# Altium PCB PCB1.PcbDoc
Units mm, origin at the board's own origin, x right, y up, seen from the top; angles counter-clockwise.
Board outline 78 x 71 mm, 2 copper layers (Top Layer, Bottom Layer); 37 components, 33 nets, 193 pads, 35 vias.
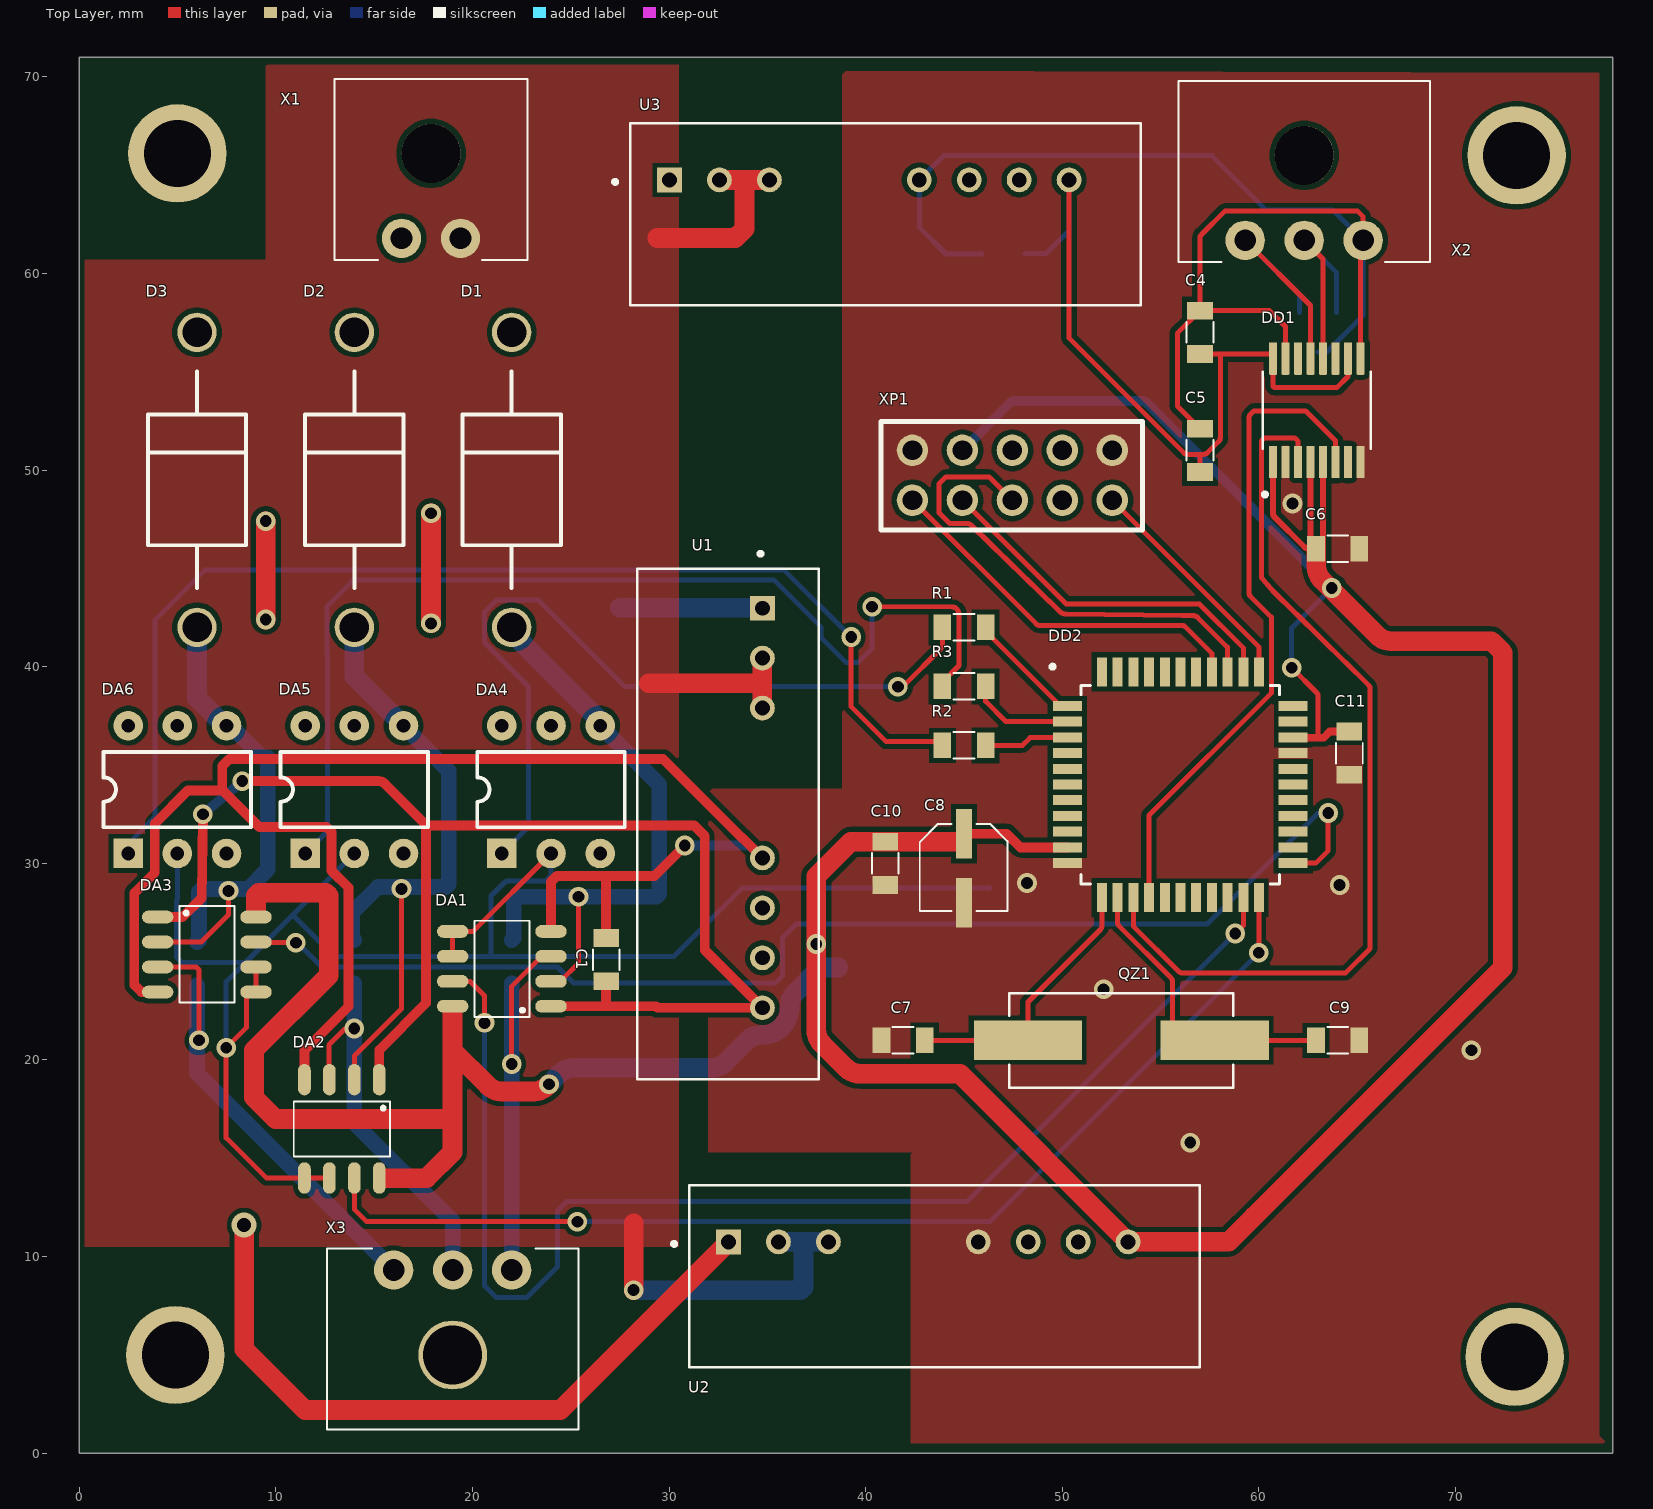
[diagram p0: Top Layer view]
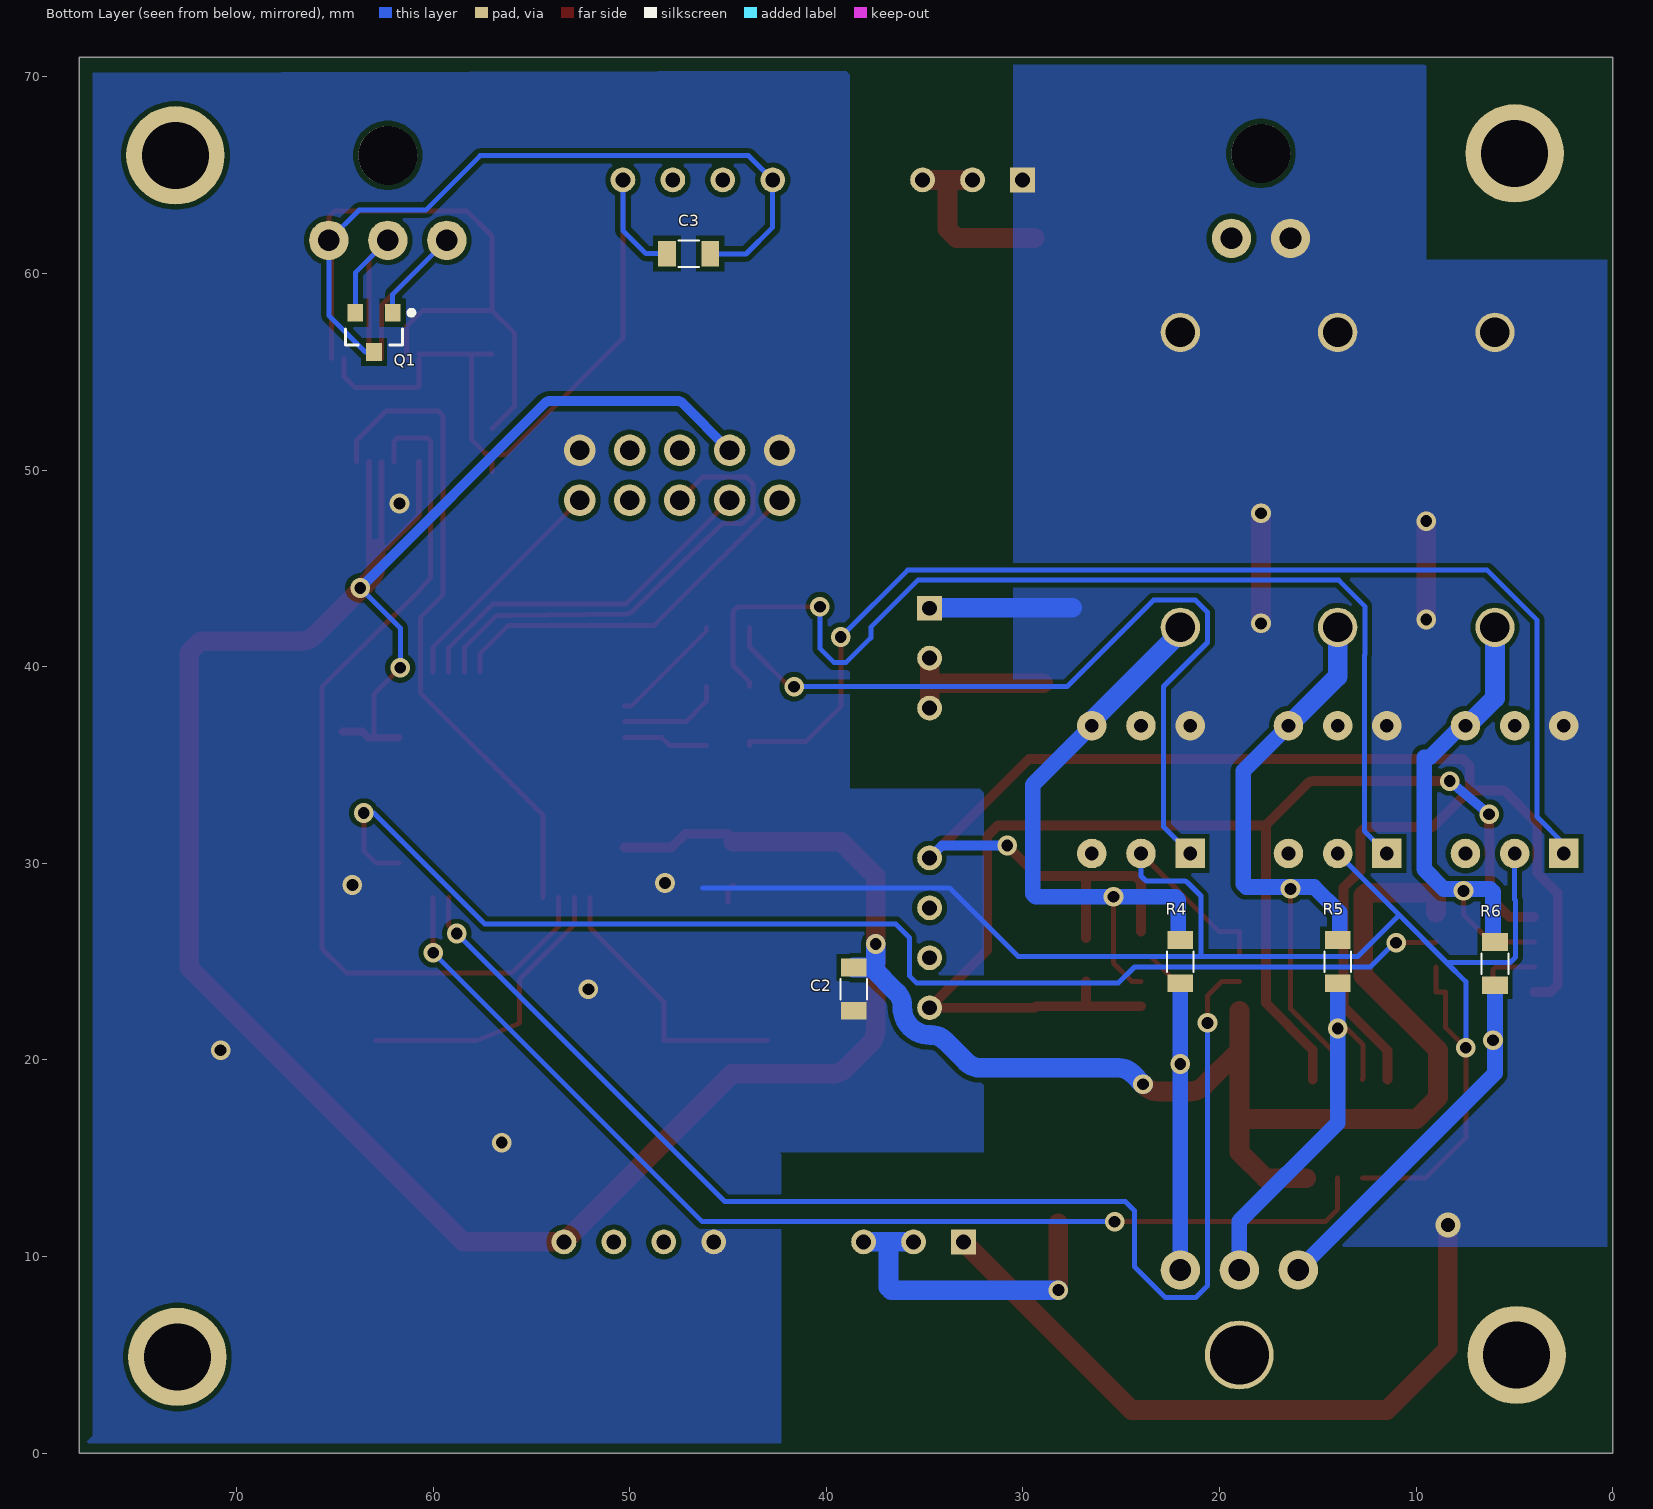
[diagram p1: Bottom Layer view, seen from below]

## Layer stack, top to bottom
Top Solder: solder mask 0.0102, Solder Resist, Dk 3.5
Top Layer: signal copper 0.0356
Dielectric 1: dielectric 0.32, FR-4, Dk 4.8
Bottom Layer: signal copper 0.0356
Bottom Solder: solder mask 0.0102, Solder Resist, Dk 3.5

## Board outline
0,0 0,71 78,71 78,0

## Design rules (kind name [scope] priority, off if disabled: settings)
Clearance [All] p1: gap=0.254 ignorepadtopadclearanceinfootprint=FALSE except(0: Arc-Hole Track-Hole SMDPad-Hole THPad-Hole Via-Hole Fill-Hole Poly-Hole Region-Hole Text-Hole; 0.1: Arc-SMDPad Arc-THPad Arc-Text Track-SMDPad Track-THPad Track-Text SMDPad-SMDPad SMDPad-THPad SMDPad-Text Text-Text)
HoleSize [All] p1: absolutevalues=TRUE maxlimit=10 minlimit=0.025 maxpercent=80.000 minpercent=20.000
MinimumSolderMaskSliver [All] p1: minsoldermaskwidth=0.01
PolygonConnect [All] p1: connectstyle=Direct reliefconductorwidth=0.254 reliefentries=4 polygonreliefangle="90 Angle" airgapwidth=0.254
RoutingVias [All] p1: holewidth=0.6 width=1 viastyle="Through Hole" minholewidth=0.5 minwidth=0.5 maxholewidth=0.711 maxwidth=1.27
SilkToSolderMaskClearance [IsPad] p1: minsilkscreentomaskgap=0.01 clearancetoexposedcopper=TRUE
SolderMaskExpansion [All] p1: expansion=0.102 istentingtop=FALSE
Width [All] p1: maxlimit=1 minlimit=0.254 preferedwidth=0.254
27 further rules are at their usual default settings.

## Components (designator, comment, footprint, x,y, rotation, side; value= is the part's Value field where it differs from the comment)
C1 "CAP" 0805 26.8,25.1 r270 top
C2 "CAP" 0805 38.6,23.6 r90 bottom
C3 "CAP" 0805 47,61 r0 bottom
C4 "CAP" 0805 57,57 r270 top
C5 "CAP" 0805 57,51 r270 top
C6 "CAP" 0805 64,46 r180 top
C7 "CAP" 0805 41.9,21 r180 top
C8 "CAP" "Cap pol 4x5.4" 45,28 r180 top
C9 "CAP" 0805 64,21 r0 top
C10 "CAP" 0805 41,30 r270 top
C11 "CAP" 0805 64.6,35.6 r270 top
D1 "Diode" Diode 22,42 r90 top
D2 "Diode" Diode 14,42 r90 top
D3 "Diode" Diode 6,42 r90 top
DA1 "Isolated Op_Amp(AMC1350)" SOIC-8 24,22.73 r180 top
DA2 "Isolated Op_Amp(AMC1350)" SOIC-8 15.27,19 r270 top
DA3 "Isolated Op_Amp(AMC1350)" SOIC-8 4,27.27 r0 top
DA4 "SSR" DIP6 21.5,30.5 r90 top
DA5 "SSR" DIP6 11.5,30.5 r90 top
DA6 "SSR" DIP6 2.5,30.5 r90 top
DD1 "ISO 1500" SSOP-16 63,53 r90 top
DD2 "Atmega16" TQFP-44 56,34 r0 top
Q1 "Bipolar TVS diode" SOT-23-3 63,57 r270 bottom
QZ1 "Quartz rez" XTAL 53,21 r180 top
R1 "Res" 0805 45,42 r180 top
R2 "Res" 0805 45,36 r180 top
R3 "Res" 0805 45,39 r180 top
R4 "RES" 0805 22,25 r90 bottom
R5 "RES" 0805 14,25 r90 bottom
R6 "RES" 0805 6,24.9 r90 bottom
U1 "Isolated DC/DC (TMR 2-2411WI)" SIP-9 33,32 r270 top
U2 "Isolated DC/DC (TMR 2-2411WI)" SIP-9 44,9 r0 top
U3 "Isolated DC/DC (TMR 2-2411WI)" SIP-9 41,63 r0 top
X1 "2 pin power connector (Molex)" "MolexMicroFit 2x1" 19.4,61.78 r180 top
X2 "3 pin RS485 connector (Molex)" "MolexMicroFit 3x1"#1 62.3,61.68 r180 top
X3 "3 pin RS485 connector (Molex)" "MolexMicroFit 3x1"#2 19,9.32 r0 top
XP1 "JTAG Connector(10pin)" "PLD 10" 42.38,48.46 r0 top

## Footprints (in the part's own frame and the unit in brackets; to place one, negate y for a bottom-side part, rotate by r counter-clockwise, add the part's x,y. Pads: shape width x height; smd on the part's side, far side on the other; paste and mask are expansions set on the pad)
0805 [mm]
  rect 0.9x1.3 smd: 1(-1.1,0) 2(1.1,0)
  silkscreen extent -0.53,-0.67 0.53,0.68, body extent -1.05,-0.68 1.05,0.68, height 0.6
"Cap pol 4x5.4" [mm]
  rect 0.8x2.5 smd: 1(0,0) 2(0,-3.5)
  silkscreen extent -2.2,-4 2.25,0.42, body extent -2.15,-4.3 2.15,0.7, height 5.4
Diode [mm]
  round 2 hole 1.5: 1(15,0) 2(0,0)
  silkscreen extent 2,-2.5 13,2.5
DIP6 [mm]
  rect 1.5x1.5 hole 0.7: 1(0,0)
  round 1.5 hole 0.7: 2(0,-2.5) 3(0,-5) 4(6.5,-5) 5(6.5,-2.5) 6(6.5,0)
  silkscreen extent 1.33,-6.25 5.17,1.25
"MolexMicroFit 2x1" [mm]
  round 2 hole 1.1: 1(3,0) 2(0,0)
  round 3 hole 3: A(1.5,-4.32)
  silkscreen extent -3.4,-8.1 6.4,1.1, body extent -3.33,-8.9 6.33,1, height 5.64
"MolexMicroFit 3x1"#1 [mm]
  round 2 hole 1.1: 1(3,0) 2(0,0) 3(-3,0)
  round 3 hole 3: A(0,-4.32)
  silkscreen extent -6.4,-8.1 6.4,1.1, body extent -6.32,-8.87 6.32,1.03, height 5.64
"MolexMicroFit 3x1"#2 [mm]
  round 2 hole 1.1: 1(3,0) 2(0,0) 3(-3,0)
  round 3.5 hole 3: A(0,-4.32)
  silkscreen extent -6.4,-8.1 6.4,1.1, body extent -6.32,-8.87 6.32,1.03, height 5.64
"PLD 10" [mm]
  round 1.6 hole 1: 1(0,0) 2(0,2.54) 3(2.54,0) 4(2.54,2.54) 5(5.08,0) 6(5.08,2.54) 7(7.62,0) 8(7.62,2.54) 9(10.16,0) 10(10.16,2.54)
  silkscreen extent -1.6,-1.5 11.7,4, body extent -1.27,-1.23 11.43,3.77, height 8.6
SIP-9 [mm]
  rect 1.258x1.258 hole 0.75: 1(-10.975,1.75)
  round 1.258 hole 0.75: 2(-8.435,1.75) 3(-5.895,1.75) 6(1.725,1.75) 7(4.265,1.75) 8(6.805,1.75) 9(9.345,1.75)
  silkscreen extent -13.84,-4.62 12.97,4.63, body extent -12.98,-4.62 12.98,4.62, height 12.5
SOIC-8 [mm]
  oval 1.6x0.65 smd: 1(0,0) 2(0,-1.27) 3(0,-2.54) 4(0,-3.81) 5(5,-3.81) 6(5,-2.54) 7(5,-1.27) 8(5,0)
  silkscreen extent 1.1,-4.35 3.9,0.55, body extent -0.36,-4.35 5.41,0.55, height 1.45
SOT-23-3 [mm]
  rect 0.9x0.8 smd: 1(-1,0.95) 2(-1,-0.95) 3(1,0)
  silkscreen extent -1.12,-1.46 0.65,2.02, body extent -1.2,-1.45 1.2,1.45, height 1.11
SSOP-16 [mm]
  rrect25% 1.65x0.41 smd: 1(-2.593,2.286) 2(-2.593,1.651) 3(-2.593,1.016) 4(-2.593,0.381) 5(-2.593,-0.254) 6(-2.593,-0.889) 7(-2.593,-1.524) 8(-2.593,-2.159) 9(2.667,-2.159) 10(2.667,-1.524) 11(2.667,-0.889) 12(2.667,-0.254) 13(2.667,0.381) 14(2.667,1.016) 15(2.667,1.651) 16(2.667,2.286)
  silkscreen extent -4.34,-2.68 1.98,2.81, body extent -3,-2.4 3,2.5, height 1.75
TQFP-44 [mil]
  rect 58x20 smd: 1(-226,157) 2(-226,126) 3(-226,94) 4(-226,63) 5(-226,31) 6(-226,0) 7(-226,-31) 8(-226,-63) 9(-226,-94) 10(-226,-126) 11(-226,-157) 23(226,-157) 24(226,-126) 25(226,-94) 26(226,-63) 27(226,-31) 28(226,0) 29(226,31) 30(226,63) 31(226,94) 32(226,126) 33(226,157)
  rect 20x58 smd: 12(-157,-226) 13(-126,-226) 14(-94,-226) 15(-63,-226) 16(-31,-226) 17(0,-226) 18(31,-226) 19(63,-226) 20(94,-226) 21(126,-226) 22(157,-226) 34(157,226) 35(126,226) 36(94,226) 37(63,226) 38(31,226) 39(0,226) 40(-31,226) 41(-63,226) 42(-94,226) 43(-126,226) 44(-157,226)
  silkscreen extent -260,-199 199,240, body extent -236,-236 236,236, height 46
XTAL [mm]
  rect 5.5x2 smd: 1(-4.75,0) 2(4.75,0)
  silkscreen extent -5.7,-2.4 5.7,2.4

## Part data
C8: library part "Cap Pol 10uF 16V", "ECAP SMD,  16VV, 105°C"
DD1: library part "MAX 485", ComponentLink1Description=Datasheet, ComponentLink1URL=https://www.ti.com/lit/ds/symlink/iso1500.pdf?ts=1632655446349&ref_url=https%253A%252F%252Fwww.ti.com%252Fisolation%252Fisolated-interfaces%252Frs-485-transceivers%252Foverview.html, ComponentLink2Description="Ссылка Chip&Dip", ComponentLink2URL=https://www.chipdip.ru/product1/8003093154
Q1: library part "Bipolar TVS", ComponentLink1Description=Chip&Dip, ComponentLink1URL=https://www.chipdip.ru/product/nup2105lt1g
QZ1: library part QZ, ComponentLink1Description=Chip&Dip, ComponentLink1URL=https://www.chipdip.ru/product0/8006373177
R4 R5 R6: library part Res
DA4 DA5 DA6: ComponentLink1Description=CHIPDIP, ComponentLink1URL=https://www.chipdip.ru/product/pvg612s
XP1: ComponentLink1Description=CHIPDIP, ComponentLink1URL=https://www.chipdip.ru/product/pld-10

## Free pads (board coordinates)
  round 5 hole 3.4: 1(4.9,5) 1(5,66.1) 1(73,4.9) 1(73.1,66)

## Via types
v1: diameter 1, hole 0.6, Top Layer to Bottom Layer, 34 vias
v2: diameter 1.27, hole 0.711, Top Layer to Bottom Layer, 1 vias

## Nets (pads, with @x,y where several pads share a name; then routed paths per layer and width w, separated by ;. In a path a pad name is that pad's centre, name@x,y a point inside that pad or via, vN(x,y) a via of type N, cw(c..) or ccw(c..) an arc to the next point about the centre after c; other vN are vias at no path point)
5В: C2.2 C6.2 C8.2 C10.1 C11.1 DA1.8 DA2.8 DA3.8 DD1.1 DD1.4 DD1.5 DD2.10 DD2.31 U2.9 XP1.4 | length 209.8
  Top Layer w0.254: DA3.8 DA3.8@9,27.5 ; DA2.8 15.27,13.989 15.611,13.989 ; DA1.8@18.993,22.493 18.993,22.6 19.221,22.6 19.221,22.73 DA1.8 ; C8.2@44.727,31.1 45,31.373 C8.2 ; v1(61.665,39.948) 62.926,38.687 cw(c62.746,38.507) 63,38.507 63,36.4 ; 62.619,45.081 62.715,44.985 ; C6.2 C6.2@62.918,45.982 ; 63.257,44.443 v1(63.7,44) ; 72.4,36.908 72.409,36.899
  Top Layer w0.3: DD1.1 60.714,47.81 ccw(c61.014,47.81) 60.801,47.599 62.313,46.087 ccw(c62.524,46.3) C6.2@62.523,46 ; C6.2@62.619,46.281 DD1.4 ; C6.2@63.254,46.054 DD1.5
  Top Layer w0.4: DD2.31 63.288,36.388 63.6,36.7 C11.1
  Top Layer w0.5: C8.2 47.175,31.5 47.875,30.8 DD2.10
  Top Layer w1: DA3.8@9,27.5 9,28.351 9.149,28.5 12.551,28.5 12.7,28.351 12.7,24.3 8.9,20.5 8.9,18.1 10,17 18.993,17 ; 15.611,13.989 17.672,13.989 18.993,15.31 18.993,17 ; DA1.8@18.993,22.493 18.993,20.491 ; v1(23.895,18.764) 23.824,18.693 cw(c23.117,19.4) 23.117,18.4 21.498,18.4 cw(c21.498,19.4) 20.791,18.693 18.993,20.491 ; C8.2@44.727,31.1 C10.1 39.248,31.1 37.484,29.336 v1(37.484,25.902) 37.484,21.53 ccw(c38.484,21.53) 37.776,20.824 39.009,19.591 ccw(c39.714,20.3) 39.712,19.3 44.795,19.3 U2.9 58.45,10.75 59.75,12.05 72.4,24.7 72.4,36.908 72.4,40.714 71.814,41.3 66.719,41.3 cw(c66.721,42.3) 66.016,41.591 63.21,44.397 cw(c63.918,45.103) 63.005,44.695 cw(c63.918,45.103) 62.918,45.103 C6.2@62.918,45.982 ; 18.993,17 18.993,20.491
  Bottom Layer w0.254: v1@61.682,39.965 v1(61.665,39.948) 61.665,41.965 v1(63.7,44)
  Bottom Layer w0.5: XP1.4 47.346,53.426 cw(c47.525,53.246) 47.525,53.5 54.095,53.5 cw(c54.095,53.246) 54.274,53.426 v1(63.7,44)
  Bottom Layer w1: v1(23.895,18.764) 24.438,19.307 cw(c25.145,18.6) 25.145,19.6 32.162,19.6 ccw(c32.165,20.6) 32.872,19.893 33.962,20.982 cw(c34.667,20.273) 34.7,21.273 ccw(c34.75,22.655) 36.132,22.706 cw(c37.132,22.738) 36.423,23.443 37.679,24.7 37.738,24.7 ; v1(37.484,25.902) 37.484,24.954 37.738,24.7 ; C2.2 37.738,24.7
5В_Op_Amp: C1.2 DA1.1 DA2.1 DA3.1 U1.9 | length 70.1
  Top Layer w0.5: DA3.1 5.251,27.27 6.242,28.233 v1(6.3,32.5) ; v1(8.299,34.182) 15.211,34.182 cw(c15.211,33.682) 15.563,34.037 17.647,31.953 17.647,31.921 ; DA2.1 15.27,20.517 17.647,22.893 17.647,31.921 ; DA1.1 26.7,22.73 ; C1.2 26.8,22.83 26.7,22.73 ; 17.647,31.921 31.286,31.921 31.82,31.388 31.82,25.585 U1.9 29.406,22.655 29.331,22.73 26.7,22.73
  Bottom Layer w0.5: v1(6.3,32.5) v1(8.299,34.182)
27В: D1.1 D2.1 D3.1 DA4.6 DA5.6 DA6.6 U1.1 U2.1 U3.1 X1.1 | length 53.8
  Top Layer w0.254: v1@17.8,42.3 v1(17.9,42.2)
  Top Layer w1: v2(8.4,11.6) 8.4,5.3 11.5,2.2 24.475,2.2 U2.1 ; v1(9.5,42.4) v1(9.5,47.4) ; v1(17.9,42.2) v1(17.9,47.8)
  Bottom Layer w0.254: U1.1@34.725,43 U1.1
  Bottom Layer w1: 27.5,43 U1.1@34.725,43
"ADC 0": DA1.7 DD2.21 | length 66.4
  Top Layer w0.254: DA1.7 19.878,24 20.618,23.26 v1(20.618,21.888) ; v1(58.795,26.435) 59.2,26.841 DD2.21
  Bottom Layer w0.254: v1(20.618,21.888) 20.618,8.528 21.228,7.918 22.752,7.918 24.327,9.493 24.327,12.338 24.784,12.795 45.155,12.795 v1(58.795,26.435)
"ADC 1": DA2.7 DD2.22 | length 56.3
  Top Layer w0.254: DA2.7 14,12.403 14.624,11.779 v1(25.343,11.779) ; v1(59.988,25.457) DD2.22
  Bottom Layer w0.254: v1(25.343,11.779) 46.31,11.779 v1(59.988,25.457)
"ADC 2": DA3.7 DD2.23 | length 64.1
  Top Layer w0.254: DA3.7 9.018,25.982 11.011,25.982 v1(11.029,25.964) ; DD2.23 62.884,30.012 63.519,30.647 v1(63.519,32.556)
  Bottom Layer w0.254: v1(11.029,25.964) 11.107,25.964 12.338,24.733 24.327,24.733 25.14,23.92 35.427,23.92 35.782,24.276 35.782,26.232 36.468,26.918 57.372,26.918 63.011,32.556 v1(63.519,32.556)
NetC3_2: C3.2 C4.2 C5.2 DD1.10 DD1.16 U3.9 | length 39
  Top Layer w0.254: U3.9 50.345,56.703 56.174,50.874 ccw(c56.353,51.054) 56.353,50.8 57,50.8 ; C5.2 57,50.797 cw(c57.254,50.797) 57,50.8 ; C4.2 DD1.16@60.7,55.9 ; 58.033,55.8 58.033,51.638 cw(c57.779,51.638) 57.959,51.459 57.374,50.874 cw(c57.195,51.054) 57.195,50.8 57,50.8 ; DD1.16 60.714,54.248 60.776,54.186 63.954,54.186 64.524,54.756 DD1.10
  Bottom Layer w0.254: C3.2 49.168,61 50.345,62.177 U3.9
NetC7_1: C7.1 DD2.12 QZ1.2 | length 14.1
  Top Layer w0.254: C7.1 QZ1.2 ; QZ1.2@48.2,21.05 QZ1.2 ; DD2.12 52.012,26.817 cw(c51.758,26.817) 51.939,26.639 48.25,22.95 QZ1.2
NetC9_1: C9.1 DD2.13 QZ1.1 | length 15
  Top Layer w0.254: DD2.13 52.8,27.006 ccw(c53.054,27.006) 52.873,26.827 52.875,26.825 ; 52.876,26.824 55.524,24.176 55.525,24.174 cw(c55.343,23.997) 55.597,23.998 55.597,21.873 QZ1.1 C9.1
NetD1_2: D1.2 DA1.2 DA4.4 R4.2 | length 31.4
  Top Layer w0.254: DA1.2 24.475,24 25.4,24.925 v1(25.4,28.3)
  Bottom Layer w0.254: D1.2@22,41.75 D1.2 ; DA4.4 DA4.4@26.5,37.25
  Bottom Layer w0.8: R4.2 22.1,26.2 22.1,28.151 22.249,28.3 29.351,28.3 29.5,28.449 29.5,34 DA4.4
  Bottom Layer w1: D1.2@22,41.75 DA4.4@26.5,37.25
NetD2_2: D2.2 DA2.2 DA5.4 R5.2 | length 32.7
  Top Layer w0.254: DA2.2 14,20.2 16.4,22.6 v1(16.4,28.7)
  Bottom Layer w0.8: R5.2 13.9,26.2 13.9,27.5 15.2,28.8 18.651,28.8 18.8,28.949 18.8,34.7 DA5.4
  Bottom Layer w1: D2.2 14,39.5 DA5.4
NetD3_2: D3.2 DA3.2 DA6.4 R6.2 | length 26.1
  Top Layer w0.254: DA3.2 6.209,26 7.6,27.391 v1(7.6,28.6)
  Bottom Layer w0.8: R6.2 6.1,26.1 6.1,28.551 6.249,28.7 8.6,28.7 9.6,29.7 9.6,35.4 9.3,35.4 8.05,36.65 8.039,36.65 7.689,37 DA6.4
  Bottom Layer w1: D3.2 6,38.4 7.4,37 DA6.4
NetDA1_3: DA1.3 R4.1 X3.1 | length 21.2
  Top Layer w0.254: v1(22,19.8) 22,23.745 23.525,25.27 DA1.3
  Bottom Layer w0.8: X3.1 R4.1
NetDA2_3: DA2.3 R5.1 X3.2 | length 20
  Top Layer w0.254: DA2.3 12.73,19.03 cw(c12.954,19.15) 12.7,19.149 12.7,20.671 cw(c12.954,20.67) 12.793,20.867 ccw(c12.634,21.064) 12.813,20.884 13.455,21.526 cw(c13.634,21.346) v1@13.633,21.6 ; v1@13.634,21.6 v1(14,21.6)
  Bottom Layer w0.8: R5.1 14,16.8 19,11.8 X3.2
NetDA3_3: DA3.3 R6.1 X3.3 | length 24.4
  Top Layer w0.254: DA3.3 5.951,24.73 6.1,24.581 v1(6.1,21)
  Bottom Layer w0.8: R6.1 6,19.32 X3.3
NetDA4_1: DA4.1 R1.2 | length 40.9
  Top Layer w0.254: v1(41.639,38.983) 41.777,38.983 ccw(c41.777,39.237) 41.956,39.056 43.826,40.926 ccw(c43.646,41.105) 43.9,41.105 R1.2
  Bottom Layer w0.254: DA4.1 22.854,31.854 22.854,38.993 20.619,41.228 20.619,42.772 21.228,43.381 23.362,43.381 27.76,38.983 v1(41.639,38.983)
NetDA5_1: DA5.1 R3.2 | length 54.4
  Top Layer w0.254: v1(40.329,43.047) 44.353,43.047 cw(c44.353,42.652) 44.748,42.652 44.748,40.06 43.9,39.211 R3.2
  Bottom Layer w0.254: DA5.1 12.643,31.643 12.643,40.583 12.617,40.608 12.617,43.072 13.942,44.397 35.348,44.397 37.738,42.007 37.738,41.47 39.008,40.2 39.6,40.2 40.329,40.929 v1(40.329,43.047)
NetDA6_1: DA6.1 R2.2 | length 58.9
  Top Layer w0.254: v1(39.262,41.511) 39.262,37.967 41.04,36.189 43.9,36.189 R2.2
  Bottom Layer w0.254: DA6.1@2.5,31 3.854,32.354 3.854,42.361 6.399,44.905 35.867,44.905 v1(39.262,41.511)
NetDD1_12: DD1.12 Q1.2 X2.2 | length 10.8
  Top Layer w0.254: X2.2 63.254,60.726 DD1.12
  Bottom Layer w0.254: X2.2 63.95,60.03 Q1.2
NetDD1_13: DD1.13 Q1.1 X2.1 | length 12.2
  Top Layer w0.254: X2.1 62.619,58.361 DD1.13
  Bottom Layer w0.254: X2.1 62.05,58.93 Q1.1
NetU1_2: U1.2 U1.3 U2.2 U2.3 U3.2 U3.3 X1.2 | length 35.2
  Top Layer w0.254: 28.1,11.8 28.2,11.7
  Top Layer w1: v1(28.2,8.3) 28.2,11.7 ; 28.965,39.165 34.75,39.165 ; 29.4,61.8 33.37,61.8 33.835,62.265 33.835,64.75 ; U3.2 33.835,64.75 ; U1.3 34.75,39.165 ; U1.2 34.75,39.165 ; U3.3 33.835,64.75
  Bottom Layer w0.254: v1@28.1,8.3 v1(28.2,8.3)
  Bottom Layer w1: v1(28.2,8.3) 36.686,8.3 36.835,8.449 36.835,10.75 ; U2.2 36.835,10.75 ; U2.3 36.835,10.75
"PB 0": DD2.1 R1.1 | length 5.9
  Top Layer w0.254: R1.1 46.1,41.802 49.914,37.988 DD2.1
"PB 1": DD2.2 R3.1 | length 5.4
  Top Layer w0.254: R3.1 46.1,38.236 47.136,37.2 DD2.2
"PB 2": DD2.3 R2.1 | length 4.3
  Top Layer w0.254: R2.1 47.974,36 48.362,36.388 DD2.3
RXD: DD1.3 DD2.14 | length 46.1
  Top Layer w0.254: DD2.14 53.612,26.806 55.916,24.503 ccw(c56.095,24.682) 56.095,24.428 64.408,24.428 65.653,25.673 65.653,38.877 ccw(c65.399,38.877) 65.577,39.058 60.687,43.876 cw(c61.4,44.6) 60.633,43.934 60.178,44.459 cw(c60.369,44.625) 60.128,44.545 cw(c60.369,44.625) 60.115,44.625 60.115,51.378 cw(c60.369,51.378) 60.369,51.632 61.73,51.632 cw(c61.73,51.378) 61.984,51.378 DD1.3
TCK: DD2.37 XP1.1 | length 19.4
  Top Layer w0.254: XP1.1 48.666,42.174 ccw(c48.845,42.354) 48.845,42.1 56.077,42.1 cw(c56.077,41.846) 56.256,42.026 57.6,40.682 DD2.37
TDI: DD2.34 XP1.9 | length 11.8
  Top Layer w0.254: XP1.9 59.988,41.012 DD2.34
TDO: DD2.35 XP1.3 | length 18.6
  Top Layer w0.254: XP1.3 50.192,43.188 56.966,43.188 59.2,40.954 DD2.35
TMS: DD2.36 XP1.5 | length 24.5
  Top Layer w0.254: XP1.5 46.269,49.651 44.088,49.651 43.732,49.295 43.732,47.826 44.279,47.279 45.175,47.279 cw(c45.175,47.025) 45.353,47.207 49.836,42.825 ccw(c50.192,43.188) 50.185,42.681 56.086,42.608 cw(c56.077,41.846) 56.1,42.608 56.691,42.589 cw(c56.683,42.335) 56.862,42.515 ; 56.862,42.515 58.388,40.99 DD2.36
TXD: DD1.6 DD2.15 | length 33.7
  Top Layer w0.254: DD2.15 54.4,32.429 60.623,38.652 60.623,42.513 59.574,43.562 cw(c59.754,43.742) 59.5,43.742 59.5,52.664 cw(c59.754,52.664) 59.574,52.843 59.734,53.003 62.376,53.003 63.889,51.49 DD1.6
"Общий 5В": C2.1 C6.1 C7.2 C8.1 C9.2 C10.2 C11.2 DA1.5 DA1.6 DA2.5 DA2.6 DA3.5 DA3.6 DA4.2 DA5.2 DA6.2 DD1.2 DD1.8 DD2.11 DD2.30 U2.6 XP1.2 XP1.10 | length 92
  Top Layer w0.254: DA3.6 DA3.5 8.528,23.46 8.528,21.66 v1(7.487,20.618) 7.487,16.046 9.544,13.989 11.46,13.989 DA2.5 DA2.6 ; DA1.6 DA1.5 20.04,26.54 DA4.2 ; C8.1@44.727,28.9 45,28.627 C8.1
  Bottom Layer w0.254: DA6.2@5,31 DA6.2 5,28.165 4.947,28.111 4.947,25.241 5.226,24.962 8.462,24.962 ; v1(7.487,20.618) 7.487,23.987 8.462,24.962 ; DA5.2 10.87,27.37 ; DA4.2 24,29.356 23.818,29.174 cw(c23.639,29.354) 23.639,29.1 21.814,29.1 ccw(c21.814,28.846) 21.634,29.026 20.949,28.34 20.949,25.267 ; 46.298,28.746 33.725,28.746 30.245,25.267 20.949,25.267 ; 8.462,24.962 10.87,27.37 ; 10.87,27.37 12.973,25.267 20.949,25.267
  other v1: 56.5,15.8 70.8,20.5 52.1,23.6 64.1,28.9 48.2,29 61.7,48.3
"Общий 5В_Оп_Ус": C1.1 DA1.4 DA2.4 DA3.4 U1.6 | length 82.8
  Top Layer w0.5: DA3.4 3.169,23.46 2.813,23.816 2.813,28.492 3.854,29.534 3.854,32.023 5.53,33.699 7.283,33.699 ; DA2.4 11.46,20.48 13.704,22.724 13.704,28.767 12.846,29.625 12.846,31.591 12.592,31.845 9.163,31.845 7.31,33.699 7.283,33.699 ; DA1.4 24,29.063 24.293,29.356 26.8,29.356 ; C1.1 26.8,29.356 ; v1(30.804,30.905) 29.254,29.356 26.8,29.356 ; U1.6 33.74,31.285 33.715,31.285 29.7,35.3 28.848,35.3 7.639,35.3 7.283,34.944 7.283,33.699
  Bottom Layer w0.5: v1(30.804,30.905) 34.12,30.905 U1.6
"Общий RS": C3.1 C4.1 C5.1 DD1.9 DD1.15 Q1.3 U3.6 X2.3 | length 71.2
  Top Layer w0.254: C5.1 55.848,53.252 55.848,56.948 C4.1 ; DD1.15 61.349,57.296 60.545,58.1 57.474,58.1 C4.1 ; DD1.9 65.159,61.434 cw(c65.413,61.434) 65.233,61.613 X2.3 65.3,62.884 65.021,63.163 58.261,63.163 57.074,61.977 ccw(c57.254,61.797) 57,61.797 C4.1
  Bottom Layer w0.254: C3.1 45.9,60.979 44.088,60.979 42.725,62.342 U3.6 43.958,65.983 57.601,65.983 60.369,63.214 63.766,63.214 X2.3 65.3,57.858 63.442,56 Q1.3
pads on no net: DA4.3 DA4.5 DA5.3 DA5.5 DA6.3 DA6.5 DD1.7 DD1.11 DD1.14 DD2.4 DD2.5 DD2.6 DD2.7 DD2.8 DD2.9 DD2.16 DD2.17 DD2.18 DD2.19 DD2.20 DD2.24 DD2.25 DD2.26 DD2.27 DD2.28 DD2.29 DD2.32 DD2.33 DD2.38 DD2.39 DD2.40 DD2.41 DD2.42 DD2.43 DD2.44 U1.7 U1.8 U2.7 U2.8 U3.7 U3.8 X1.A X2.A X3.A XP1.6 XP1.7 XP1.8

## Polygon pours and split planes (outlines as drawn)
27В on Bottom Layer "27В_L02_P000" (solid, remove dead copper, pour order 0): 9.5,70.7 9.6,70.6 30.5,70.6 30.5,10.5 30.4,10.5 30.2,10.5 0.3,10.5 0.3,60.7 9.5,60.7
"Общий 5В" on Bottom Layer "Общий_5В_L02_P004" (solid, remove dead copper, pour order 4): 39,70.3 38.8,70.1 38.8,33.8 32.2,33.8 32,33.6 32,15.3 42.4,15.3 42.3,15.2 42.3,0.5 77.5,0.5 77.6,0.6 77.3,0.9 77.3,70.2
"Общий 5В" on Top Layer "Общий_5В_L01_P002" (solid, remove dead copper, pour order 2): 39,70.3 38.8,70.1 38.8,33.8 32.2,33.8 32,33.6 32,15.3 42.4,15.3 42.3,15.2 42.3,0.5 77.5,0.5 77.6,0.6 77.3,0.9 77.3,70.2
NetU1_2 on Top Layer "NETU1_2_L01_P001" (solid, remove dead copper, pour order 1): 9.5,70.7 9.6,70.6 30.5,70.6 30.5,10.5 30.4,10.5 30.2,10.5 0.3,10.5 0.3,60.7 9.5,60.7

## Silkscreen, mask and mechanical layers (free items; w line width, h text height)
Mechanical 13:
  the board outline again, w0.254